# EAGLE board Robot Arm_Souri (EAGLE 5.06)
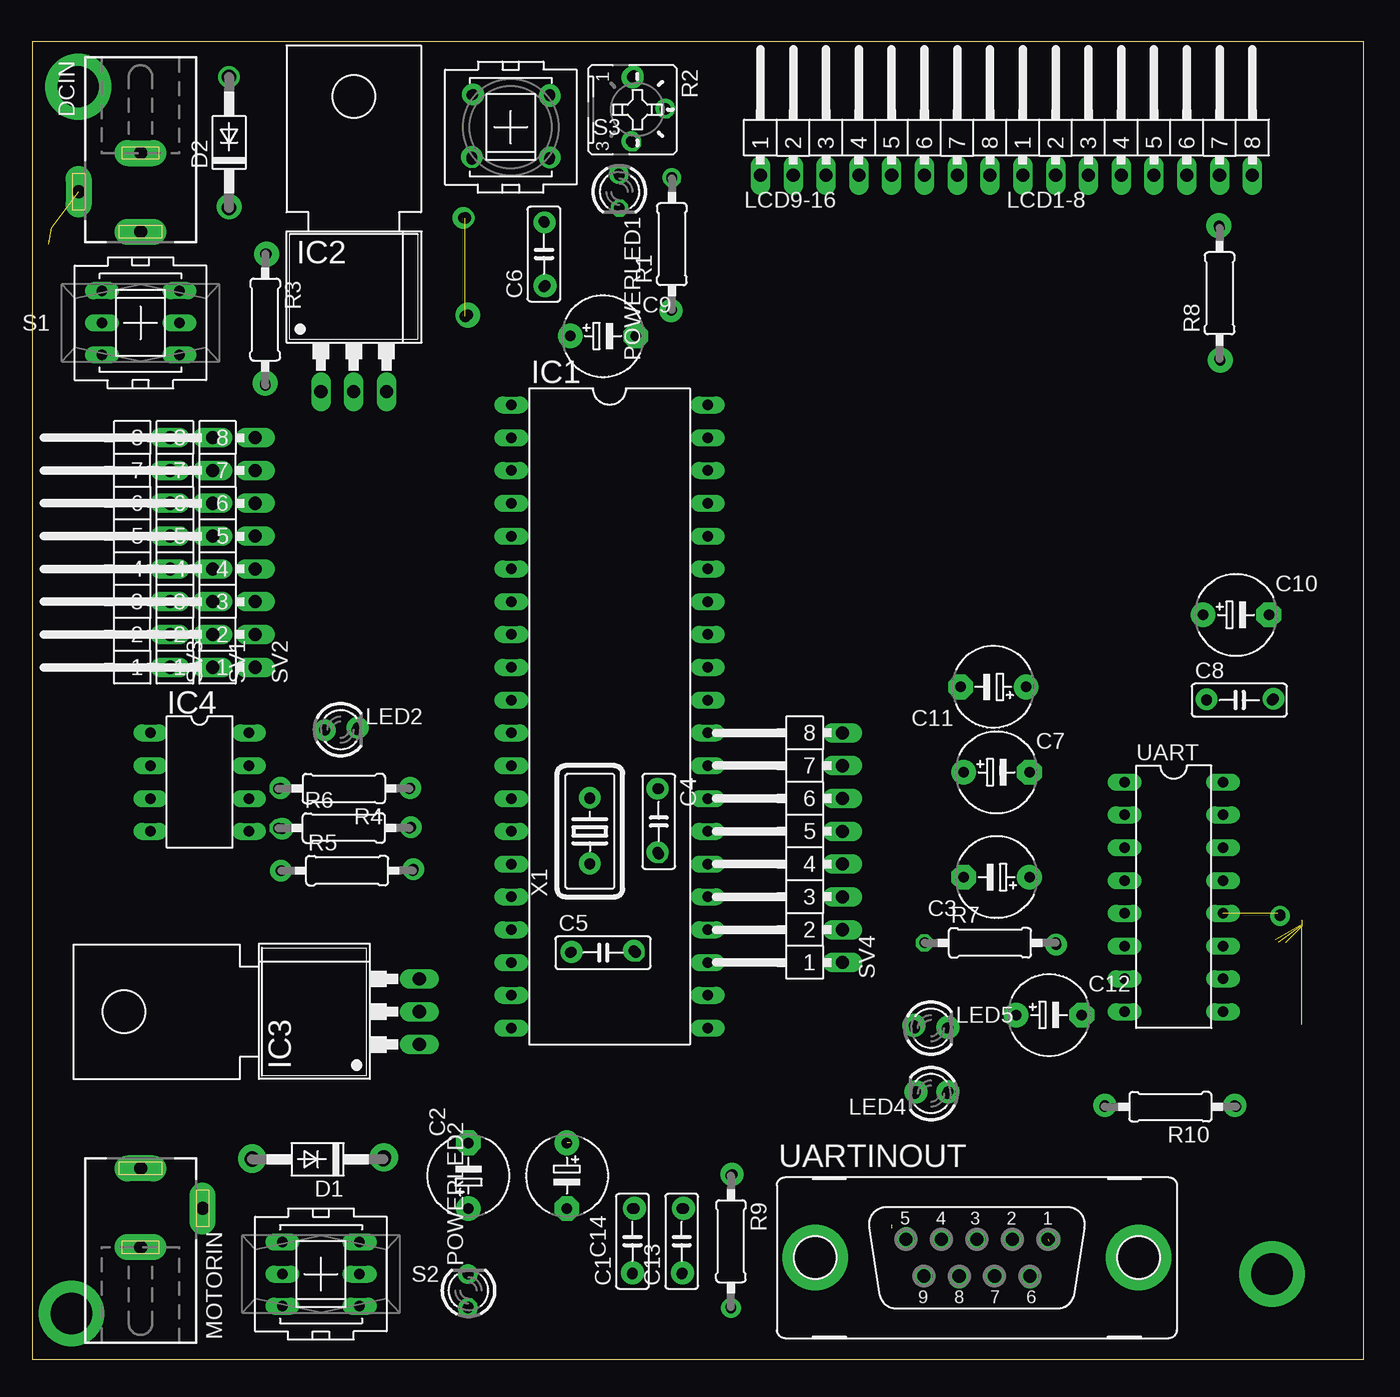
[diagram p0: board, top side]
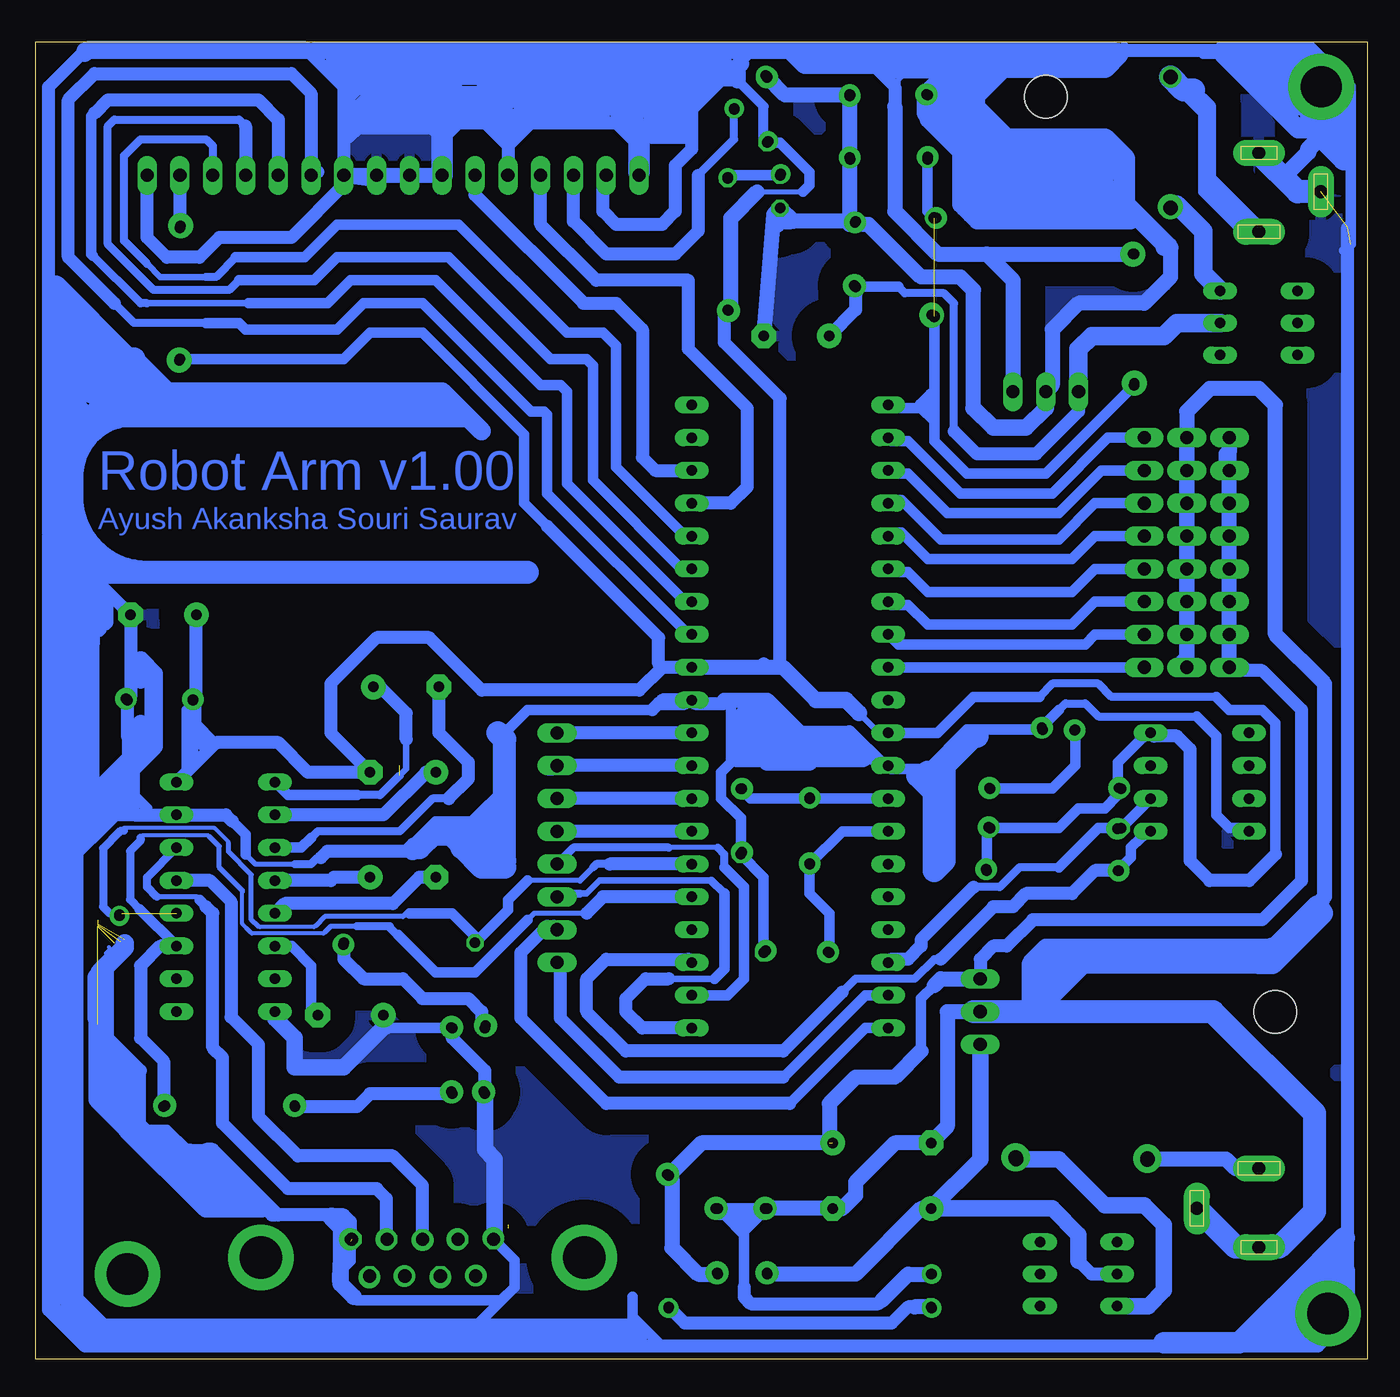
[diagram p1: board, bottom side, seen from below]

Size 103.1 x 102.03 mm. Coordinates in mm from the lower left corner, seen from the top.
Outline: 0,0 103.1,0 103.1,102.03 0,102.03 0,0
Copper layers (1*16): Top 0.035mm / dielectric 1.5mm / Bottom 0.035mm
Design rules "default *": minimum track width 10mil, minimum drill 24mil, track to track 8mil, track to pad 8mil, pad to pad 8mil, via to via 8mil, smd to smd 8mil, copper to edge 40mil, drill to drill 8mil, minimum pad ring 10mil, minimum via ring 8mil, stop-mask expansion 4mil, vias tented up to drill 0mil, thermal gap 10mil

## Footprints (pad centres in the part's own frame; a part is rotated, then mirrored left to right if it is on the bottom)
C050-025X075 = drill 0.813 octagon: 1 -2.54,0; 2 2.54,0
E5-6 = drill 0.813 pad 1.905 round: + -2.54,0 | drill 0.813 pad 1.905 octagon: - 2.54,0
DO41-10 = drill 1.118 round: A 5.08,0; C -5.08,0
DCJ0303 = drill 1 pad 2 long: 1 0,3.1; 2 4.8,0; 3 0,-3
DIL40 = drill 0.813 long: 1 -24.13,-7.62; 2 -21.59,-7.62; 3 -19.05,-7.62; 4 -16.51,-7.62; 5 -13.97,-7.62; 6 -11.43,-7.62; 7 -8.89,-7.62; 8 -6.35,-7.62; 9 -3.81,-7.62; 10 -1.27,-7.62; 11 1.27,-7.62; 12 3.81,-7.62; 13 6.35,-7.62; 14 8.89,-7.62; 15 11.43,-7.62; 16 13.97,-7.62; 17 16.51,-7.62; 18 19.05,-7.62; 19 21.59,-7.62; 20 24.13,-7.62; 21 24.13,7.62; 22 21.59,7.62; 23 19.05,7.62; 24 16.51,7.62; 25 13.97,7.62; 26 11.43,7.62; 27 8.89,7.62; 28 6.35,7.62; 29 3.81,7.62; 30 1.27,7.62; 31 -1.27,7.62; 32 -3.81,7.62; 33 -6.35,7.62; 34 -8.89,7.62; 35 -11.43,7.62; 36 -13.97,7.62; 37 -16.51,7.62; 38 -19.05,7.62; 39 -21.59,7.62; 40 -24.13,7.62
78MXXL = drill 1.016 long: GND 0,-5.08; IN -2.54,-5.08; OUT 2.54,-5.08 | hole 3.302: 0,17.78
DIL8 = drill 0.813 long: 1 -3.81,-3.81; 2 -1.27,-3.81; 3 1.27,-3.81; 4 3.81,-3.81; 5 3.81,3.81; 6 1.27,3.81; 7 -1.27,3.81; 8 -3.81,3.81
MA08-1W = drill 1.016 long: 1 -8.89,0; 2 -6.35,0; 3 -3.81,0; 4 -1.27,0; 5 1.27,0; 6 3.81,0; 7 6.35,0; 8 8.89,0
LED3MM = drill 0.813 octagon: A -1.27,0; K 1.27,0
0207/10 = drill 0.813 octagon: 1 -5.08,0; 2 5.08,0
B25P = drill 0.813 octagon: A -2.54,0; E 2.54,0; S 0,2.54
PVA2F = drill 0.813 long: 1 -2.997,2.489; 2 -2.997,0; 3 -2.997,-2.489; 4 2.997,2.489; 5 2.997,0; 6 2.997,-2.489
PVA1R = drill 0.813 octagon: 1 -2.997,2.489; 2 -2.997,-2.489; 3 2.997,2.489; 4 2.997,-2.489
DIL16 = drill 0.813 long: 1 -8.89,-3.81; 2 -6.35,-3.81; 3 -3.81,-3.81; 4 -1.27,-3.81; 5 1.27,-3.81; 6 3.81,-3.81; 7 6.35,-3.81; 8 8.89,-3.81; 9 8.89,3.81; 10 6.35,3.81; 11 3.81,3.81; 12 1.27,3.81; 13 -1.27,3.81; 14 -3.81,3.81; 15 -6.35,3.81; 16 -8.89,3.81
F09VP = drill 1.016 octagon: 1 5.486,1.422; 2 2.743,1.422; 3 0,1.422; 4 -2.743,1.422; 5 -5.486,1.422; 6 4.115,-1.422; 7 1.372,-1.422; 8 -1.372,-1.422; 9 -4.115,-1.422 | drill 3.302 pad 5.08 round: G1 -12.522,0; G2 12.522,0
HC18U-V = drill 0.813 round: 1 -2.54,0; 2 2.54,0

## Placement (x,y rotation side)
C1  [C050-025X075]  46.48,9.14 90 top
C2  [E5-6]  33.78,14.22 90 top
C3  [E5-6]  74.68,37.34 180 top
C4  [C050-025X075]  48.51,41.66 270 top
C5  [C050-025X075]  44.2,31.5 0 top
C6  [C050-025X075]  39.62,85.6 90 top
C7  [E5-6]  74.68,45.47 0 top
C8  [C050-025X075]  93.47,51.05 0 top
C9  [E5-6]  44.2,79.25 0 top
C10  [E5-6]  93.22,57.66 0 top
C11  [E5-6]  74.42,52.07 180 top
C12  [E5-6]  78.74,26.67 0 top
C13  [C050-025X075]  50.29,9.14 90 top
C14  [E5-6]  41.4,14.22 270 top
D1  1N4004  [DO41-10]  22.1,15.49 180 top
D2  1N4004  [DO41-10]  15.24,94.23 90 top
DCIN  [DCJ0303]  8.38,90.42 180 top
IC1  PIC16F877P  [DIL40]  44.7,49.78 270 top
IC2  [78MXXL]  24.89,80.01 0 top
IC3  [78MXXL]  24.89,26.92 90 top
IC4  24C64P  [DIL8]  12.95,44.7 270 top
LCD1-8  [MA08-1W]  85.6,91.69 0 top
LCD9-16  [MA08-1W]  65.28,91.69 0 top
LED2  [LED3MM]  23.88,48.77 0 top
LED4  [LED3MM]  69.6,20.57 180 top
LED5  [LED3MM]  69.6,25.65 0 top
MOTORIN  [DCJ0303]  8.38,11.68 0 top
POWERLED1  [LED3MM]  45.47,90.42 270 top
POWERLED2  [LED3MM]  33.78,5.33 90 top
R1  [0207/10]  49.53,86.36 90 top
R2  [B25P]  46.48,96.77 270 top
R3  [0207/10]  18.03,80.52 270 top
R4  [0207/10]  24.13,44.2 180 top
R5  [0207/10]  24.38,37.85 0 top
R6  [0207/10]  24.13,41.15 0 top
R7  [0207/10]  74.17,32.26 0 top
R8  [0207/10]  91.95,82.55 90 top
R9  [0207/10]  54.1,9.14 270 top
R10  [0207/10]  88.14,19.56 180 top
S1  PVA2F  [PVA2F]  8.38,80.26 180 top
S2  PVA2F  [PVA2F]  22.35,6.6 0 top
S3  PVA1R  [PVA1R]  37.05,95.42 0 top
SV1  [MA08-1W]  13.97,62.48 90 top
SV2  [MA08-1W]  17.27,62.48 90 top
SV3  [MA08-1W]  10.67,62.48 90 top
SV4  [MA08-1W]  62.74,39.62 90 top
UART  MAX232  [DIL16]  88.39,35.81 270 top
UARTINOUT  [F09VP]  73.15,7.87 0 top
X1  [HC18U-V]  43.18,40.89 90 top

## Library data of the parts
C1-C14 R1 R3-R10 = rcl
D1 D2 = diode
DCIN MOTORIN = con-jack
IC1 IC4 = microchip
IC2 IC3 = v-reg
LCD1-8 LCD9-16 SV1-SV4 = con-lstb
LED2 LED4 LED5 POWERLED1 POWERLED2 = led
R2 = pot
S1-S3 = switch-misc
UART = maxim
UARTINOUT = con-subd
X1 = crystal

## Nets
D0: IC1.19 SV4.1
D1: IC1.20 SV4.2
D2: IC1.21 SV4.3
D3: IC1.22 SV4.4
D4: IC1.27 SV4.5
D5: IC1.28 SV4.6
D6: IC1.29 SV4.7
D7: IC1.30 SV4.8
GND: C4.2 C5.2 C6.2 C8.2 C9.- C10.- C12.+ DCIN.2 DCIN.3 IC1.12 IC1.31 IC2.GND IC4.4 LCD1-8.1 LCD1-8.2 LCD1-8.8 LCD9-16.1 LCD9-16.5 LCD9-16.7 LCD9-16.8 LED2.K LED4.K LED5.K POWERLED1.K R2.A S3.1 S3.3 S3.4 UART.8 UART.15 UARTINOUT.1 UARTINOUT.5
GND1: C1.2 C2.- C13.2 C14.- IC3.GND MOTORIN.2 MOTORIN.3 POWERLED2.K SV1.1 SV1.8
N$1: IC1.2 SV2.8
N$2: IC1.3 SV2.7
N$3: IC1.4 SV2.6
N$4: IC1.5 SV2.5
N$5: IC1.6 SV2.4
N$6: IC1.7 SV2.3
N$7: IC1.8 SV2.2
N$8: IC1.9 SV2.1
N$9: C4.1 IC1.13 X1.2
N$10: C5.1 IC1.14 X1.1
N$11: D2.C S1.3
N$12: POWERLED1.A R1.2
N$13: C11.+ UART.1
N$14: C11.- UART.3
N$15: C3.+ UART.4
N$16: C7.+ UART.2
N$17: IC1.26 R7.1 UART.12
N$18: IC1.25 R10.1 UART.11
N$19: C3.- UART.5
N$20: C12.- UART.6
N$21: UART.13 UARTINOUT.3
N$22: UART.14 UARTINOUT.2
N$23: IC1.37 LCD9-16.4
N$24: IC1.38 LCD9-16.6
N$25: IC1.33 LCD1-8.3
N$26: IC1.34 LCD1-8.4
N$27: IC1.35 LCD1-8.5
N$28: IC1.36 LCD1-8.6
N$29: IC1.23 IC4.5 R5.1
N$30: IC1.18 IC4.6 R6.1
N$31: C6.1 C9.+ IC2.IN S1.2
N$32: IC1.1 R3.2 S3.2
N$33: D2.A DCIN.1
N$34: LED4.A R10.2
N$35: LCD9-16.3 R2.S
N$36: LCD1-8.7 R8.2
N$37: LED2.A R4.1
N$38: D1.A MOTORIN.1
N$39: D1.C S2.3
N$40: POWERLED2.A R9.2
N$41: C1.1 C2.+ IC3.IN S2.2
N$44: LED5.A R7.2
VCC: C7.- C8.1 C10.+ IC1.11 IC1.32 IC2.OUT IC4.8 LCD9-16.2 R1.1 R2.E R3.1 R4.2 R5.2 R6.2 R8.1 UART.16
VCC1: C13.1 C14.+ IC3.OUT R9.1 SV3.1 SV3.2 SV3.3 SV3.4 SV3.5 SV3.6 SV3.7 SV3.8

## Tracks (layer width: path | path; a pad name or v marks a point on that pad's centre or on a via)
D0
  Bottom 0.813: IC1.19 38.86,28.19 45.21,21.84
  Bottom 1.016: 45.21,21.84 57.91,21.84 62.48,26.42 62.48,30.48 SV4.1
D1
  Bottom 0.813: IC1.20 38.86,25.65 44.7,19.81
  Bottom 1.016: 44.7,19.81 58.93,19.81 65.53,26.42 65.53,31.5 63.5,33.53 62.99,33.53 SV4.2
D2
  Bottom 0.508: 54.1,29.46 50.55,29.46 | 50.8,37.08 59.44,37.08 60.45,36.07 60.96,36.07
  Bottom 0.61: 49.78,36.07 50.8,37.08 | 60.96,36.07 62.48,36.07 SV4.3
  Bottom 0.813: 49.78,36.07 49.78,30.23 50.55,29.46
  Bottom 1.016: IC1.21 56.13,25.65 57.4,26.92 57.4,27.94 55.88,29.46 54.1,29.46
D3
  Bottom 0.406: 50.29,39.62 54.1,39.62
  Bottom 0.61: 49.78,38.1 49.78,39.12 50.29,39.62 | SV4.4 61.47,39.62 54.1,39.62
  Bottom 0.813: IC1.22 49.53,28.19 48.26,29.46 48.26,36.58 49.78,38.1
D4
  Bottom 1.016: IC1.27 SV4.5
D5
  Bottom 1.016: IC1.28 SV4.6
D6
  Bottom 1.016: IC1.29 SV4.7 | SV4.7 63.25,45.97 63.5,45.72 62.99,45.72 SV4.7
D7
  Bottom 1.016: IC1.30 SV4.8
GND  (via drill 0.8 pad 1.52)  (3 unrouted)
  Bottom 0.406: 83.06,38.35 86.11,38.35 86.87,39.12 | 96.01,42.16 95.5,42.16
  Bottom 0.508: 54.61,51.05 IC1.31 | 49.78,50.8 49.78,51.05 | 19.3,101.09 12.7,101.09 | 18.8,101.6 11.43,101.6 11.18,101.6
  Bottom 0.61: 13.21,49.78 20.83,49.78 21.84,50.8 23.37,50.8 23.88,50.29 | 81.03,38.86 81.28,38.86 81.79,38.35 83.06,38.35
  Bottom 0.813: 49.78,51.05 49.28,50.55 49.28,46.23 50.04,45.47 50.04,43.43 48.51,41.91 C4.2 46.74,37.34 C5.2 | IC1.12 36.83,45.72 34.04,45.72 30.99,48.77 LED2.K 24.89,49.02 24.89,49.28 23.88,50.29 | LED5.K 75.95,25.65 | 95,22.35 95,18.29 94.49,17.78 92.96,17.78 91.44,16.26 89.92,16.26 | 78.74,9.14 78.74,7.62 79.76,6.6 79.76,6.1 78.49,4.83 78.23,4.57 67.06,4.57 66.04,5.59 | 66.04,5.59 66.04,7.67 UARTINOUT.5 | 13.21,49.78 11.68,48.26 11.68,42.16 10.67,41.15 9.4,41.15 IC4.4 | 55.37,50.29 65.02,50.29 66.55,48.77 66.55,44.45 69.34,41.66 72.14,41.66 73.91,39.88 | 18.8,101.6 19.3,101.09 | 18.8,88.9 18.29,88.9 15.24,85.85 | 12.7,101.09 11.18,101.09 | 86.87,39.12 86.87,40.64 88.39,42.16 | 96.01,48.26 96.01,42.16 | 56.9,4.83 56.9,3.3 54.61,1.02 | 11.43,101.6 4.32,101.6 1.27,98.55 1.27,86.36 1.78,85.85 | 70.61,1.02 66.04,5.59
  Bottom 1.016: UARTINOUT.5 67.67,9.04 | R2.A v46.58,99.42 46.74,99.57 | 49.78,50.8 52.07,50.8 IC1.31 | 54.61,51.05 53.09,51.05 52.83,50.8 54.86,50.8 55.37,50.29 | 87.88,41.66 88.39,42.16 UART.15 95.5,42.16 | 96.01,48.26 C8.2 95.76,51.31 C10.- 101.98,63.88 | 101.98,63.88 102.11,64.01 102.11,98.55 99.06,101.6 82.3,101.6 82.04,101.35 79.25,98.55 LCD1-8.2 79.25,90.93 83.31,86.87 88.9,86.87 90.42,85.34 92.96,85.34 94.49,86.87 LCD1-8.8 | 95,22.35 97.54,24.89 97.54,30.48 | 101.98,63.88 101.6,63.5 | 101.98,63.88 102.11,63.75 102.11,3.81 99.31,1.02 70.61,1.02 54.61,1.02 3.81,1.02 1.52,3.3 1.52,87.63 | 73.91,39.88 74.42,39.37 80.52,39.37 81.03,38.86 | LCD9-16.1 56.39,91.95 56.39,93.98 58.17,95.76 64.77,95.76 66.55,93.98 | 66.55,93.98 LCD9-16.5 | LCD9-16.7 71.63,94.49 70.36,95.76 68.33,95.76 66.55,93.98 | 78.74,9.14 78.74,10.67 79.25,11.18 84.33,11.18 89.41,16.26 89.92,16.26 | LED5.K 70.87,24.89 68.33,22.35 LED4.K | 75.95,25.65 75.95,26.42 C12.+
  Bottom 1.143: IC1.12 37.59,45.97 40.13,48.51 43.94,48.51 46.48,51.05 49.78,51.05 | 30.48,73.66 30.48,82.8 31.5,83.82 34.54,83.82 38.61,87.88 40.13,87.88 C6.2 | C6.2 44.45,88.14 POWERLED1.K 45.97,88.65 C9.- | R2.A 45.08,97.91 S3.3 S3.4 40.05,88.47 C6.2 | 15.24,85.85 15.24,83.82 17.27,81.79 22.35,81.79 24.38,79.76 24.38,75.44 IC2.GND | LCD9-16.8 LCD9-16.7 LCD9-16.8 | LCD1-8.1 LCD9-16.8 | LCD1-8.2 LCD1-8.1 | LCD1-8.2 77.22,91.44 | LCD1-8.2 LCD1-8.1
  Bottom 1.27: 30.48,73.66 28.96,72.14 26.42,72.14 24.89,73.66 IC2.GND | 79.5,7.37 79.5,5.84 78.49,4.83 | LED4.K 68.33,16.26 67.56,15.49 67.56,9.4 UARTINOUT.5 | C12.+ 76.2,25.65 79.25,22.61 83.06,22.61 83.06,24.89 84.58,26.42 UART.8 | 82.04,101.35 99.31,101.35 99.31,101.09 | 71.63,94.74 72.39,95.5 78.23,95.5 78.99,94.74 78.99,97.79 78.23,98.55 70.87,98.55 70.36,98.04 76.96,98.04 78.23,96.77 71.88,96.77 71.63,97.03 | 25.4,100.08 27.94,100.08 30.23,97.79 30.23,97.03 27.94,94.74
  Bottom 1.422: 11.18,101.09 8.89,98.81 | 8.89,98.81 8.64,98.55 | 4.32,95.25 5.33,95.25 8.89,98.81 | 8.89,98.81 8.89,99.31 7.87,100.33 7.11,100.33 5.08,98.3 5.08,99.06 5.59,99.57 5.59,97.28 5.33,97.03 5.59,97.03 7.62,99.06
  Bottom 1.676: 19.3,101.09 20.32,100.08 25.4,100.08 31.89,100.08 S3.1 34.06,96.54 32,94.49 20.32,94.49 18.8,92.96 18.8,88.9 | 56.39,91.95 56.39,95.25 59.18,98.04 63.75,98.04 66.55,95.25 69.09,97.79 69.85,97.79 71.37,96.27 71.37,96.01 71.63,95.76 71.63,94.74 LCD9-16.7
  Bottom 1.778: 18.8,88.9 23.88,88.9 24.38,89.41 20.83,89.41 19.81,90.42 | DCIN.2 5.38,90.42 DCIN.3
  pour Bottom (isolate 1.93): 5.33,101.35 99.82,101.35 102.11,99.06 102.11,3.81 99.31,1.02 3.05,1.02 1.27,2.79 1.27,98.3 4.32,101.35
GND1  (via drill 0.8 pad 1.78)
  Bottom 0.813: 48.26,9.65 48.26,9.91 C1.2 v46.63,11.68 C13.2 | 48.26,9.65 48.26,5.59 | 50.29,11.18 49.78,11.18 48.26,9.65 | 48.26,9.65 48.26,10.67 47.75,11.18 48.77,11.18 48.77,10.67 49.28,11.18
  Bottom 1.016: 37.59,4.57 37.85,4.32 47.75,4.32 48.26,4.83 48.26,5.59
  Bottom 1.143: SV1.8 13.97,54.36 14.73,53.59 SV1.1 13.97,73.41 12.19,75.18 8.38,75.18 7.11,73.91 7.11,56.13 3.3,52.32 3.3,35.81 7.11,32 24.89,32 26.16,30.73 26.16,26.92 IC3.GND 30.48,26.92 32.51,26.92 32.51,18.03 C2.- 36.58,16.76 39.62,13.72 39.62,12.7 40.64,11.68 C14.- C1.2 | POWERLED2.K 35.56,6.6 37.59,4.57
  Bottom 1.778: MOTORIN.2 10.18,8.68 MOTORIN.3 6.81,8.68 4.06,11.43 4.06,19.05 11.94,26.92 30.48,26.92
N$1
  Bottom 0.813: SV2.8 20.07,71.37 24.38,67.06 31.5,67.06 35.56,71.12 36.83,71.12 IC1.2
N$2
  Bottom 0.813: SV2.7 20.57,68.83 23.88,65.53 32.51,65.53 35.56,68.58 36.83,68.58 IC1.3
N$3
  Bottom 0.813: SV2.6 21.08,66.29 23.88,63.5 33.02,63.5 36.07,66.55 36.83,66.55 IC1.4
N$4
  Bottom 0.813: SV2.5 21.08,63.75 22.86,61.98 34.04,61.98 36.07,64.01 36.83,64.01 IC1.5
N$5
  Bottom 0.813: SV2.4 21.08,61.21 22.86,59.44 34.04,59.44 35.56,60.96 36.83,60.96 IC1.6
N$6
  Bottom 0.813: SV2.3 21.08,58.67 22.86,56.9 34.04,56.9 35.56,58.42 36.83,58.42 IC1.7
N$7
  Bottom 0.813: SV2.2 21.08,56.13 21.84,55.37 36.32,55.37 IC1.8
N$8
  Bottom 0.813: SV2.1 IC1.9
N$9
  Bottom 0.813: IC1.13 X1.2 47.75,43.43 C4.1
N$10
  Bottom 0.813: C5.1 41.66,34.54 43.18,36.07 X1.1 40.64,40.89 IC1.14
N$11
  Bottom 1.422: D2.C 14.73,89.41 12.7,87.38 12.7,84.07 S1.3
N$12
  Bottom 0.813: POWERLED1.A 49.28,91.69 R1.2
N$13  (1 unrouted)
  Bottom 0.508: 74.42,48.01 74.42,45.72 74.93,45.21
  Bottom 0.61: 74.93,45.21 76.45,43.69 78.23,43.69
  Bottom 0.813: 78.23,43.69 83.57,43.69 UART.1
  Bottom 1.016: C11.+ 76.45,52.07 74.42,50.04 74.42,48.01
N$14
  Bottom 0.61: 71.12,43.43 72.39,43.43 74.93,40.89 81.28,40.89 81.79,40.39
  Bottom 0.813: 81.79,40.39 82.55,39.62 UART.3
  Bottom 1.016: C11.- 71.88,48.51 69.6,46.23 69.6,44.96 71.12,43.43
N$15
  Bottom 1.016: C3.+ 80.01,37.34 80.26,37.08 UART.4
N$16
  Bottom 1.016: C7.+ 72.9,45.47 76.2,42.16 UART.2
N$17  (1 unrouted)
  Bottom 0.305: 85.9,33.53 85.85,33.58 85.75,33.48 81.58,33.48 81.48,33.58 81.43,33.58 | 88.19,39.98 88.19,40.08 89.26,41.15 96.32,41.15 96.67,40.79 | 96.27,40.95 96.16,41.05
  Bottom 0.406: 60.96,37.08 65.02,37.08 | 74.17,34.54 74.42,34.54 74.68,34.29 80.72,34.29 81.43,33.58 | 88.19,39.98 88.19,39.32 86.41,37.54 86.41,34.04 85.9,33.53
  Bottom 0.508: 59.94,38.1 60.96,37.08
  Bottom 0.61: 58.67,38.35 59.69,38.35 59.94,38.1 | 96.47,34.54 97.38,34.54 97.89,35.05 97.89,39.57 96.67,40.79 96.52,40.95 96.27,40.95
  Bottom 0.813: 65.02,37.08 66.55,35.56 66.55,34.8 R7.1 69.09,32.77 70.87,34.54 74.17,34.54
  Bottom 1.016: IC1.26 58.67,38.35
N$18
  Bottom 0.305: 86.82,33.43 87.12,33.73 87.12,36.22 | 80.72,33.07 80.82,32.97 86.36,32.97 86.46,33.07 | 89.66,40.49 89.76,40.59 94.79,40.59 95,40.39
  Bottom 0.356: 86.46,33.07 86.82,33.43
  Bottom 0.406: 60.45,34.54 64.52,34.54 65.02,34.04 | 78.23,33.53 80.26,33.53 80.72,33.07 | 87.12,36.22 87.12,36.32 88.9,38.1 88.9,39.73 89.66,40.49
  Bottom 0.61: 75.79,33.53 75.69,33.53 | 75.79,33.53 78.23,33.53 | 75.03,32.87 75.13,32.87 75.79,33.53 | 95,40.39 95,40.18 95.81,39.37 95.81,35.61 95.05,34.85
  Bottom 0.813: 65.02,34.04 69.09,29.97 72.14,29.97 75.03,32.87 | 95.05,34.85 UART.11
  Bottom 1.016: R10.1 93.22,23.11 95,24.89 95,30.48 93.47,32 UART.11 | IC1.25 59.18,35.81 60.45,34.54
N$19
  Bottom 1.016: C3.- 73.41,37.34 75.44,35.31 83.82,35.31 UART.5
N$20
  Bottom 0.813: UART.6 83.31,32 81.79,30.48 81.79,26.92 C12.-
N$21
  Bottom 1.016: UARTINOUT.3 73.15,13.46 75.44,15.75 82.8,15.75 85.85,18.8 85.85,24.38 87.99,26.52 87.99,35.46 89.61,37.08 UART.13
N$22
  Bottom 0.406: 90.42,35.56 90.68,35.81 93.73,35.81
  Bottom 0.61: UART.14 94.49,37.34 94.49,36.58 93.73,35.81
  Bottom 0.813: 89.92,35.05 90.42,35.56
  Bottom 1.016: 89.92,35.05 89.41,34.54 89.41,24.13 88.65,23.37 88.65,18.29 83.57,13.21 76.71,13.21 75.95,12.45 75.95,9.35 UARTINOUT.2
N$23
  Bottom 1.016: LCD9-16.4 64.01,87.88 59.69,83.57 52.58,83.57 52.58,78.23 48.01,73.66 48.01,67.56 49.28,66.29 IC1.37
N$24
  Bottom 1.016: LCD9-16.6 69.09,90.17 60.71,81.79 58.17,81.79 56.13,79.76 56.13,69.85 55.12,68.83 IC1.38
N$25
  Bottom 0.61: 97.03,81.79 95.5,80.26 89.92,80.26
  Bottom 0.813: IC1.33 52.58,56.13 63.5,67.06 63.5,73.15 63.75,73.41 64.77,73.41 73.15,81.79 77.72,81.79 78.1,81.41 79.76,79.76 86.87,79.76 87.38,80.26 89.92,80.26
  Bottom 1.016: LCD1-8.3 81.53,91.95 81.28,91.95 81.79,92.46 81.79,98.04 83.31,99.57 98.55,99.57 100.58,97.54 100.58,85.34 97.03,81.79
N$26
  Bottom 0.508: 86.61,81.79 94.49,81.79
  Bottom 0.61: 94.49,81.79 95,81.79 98.68,85.47
  Bottom 0.813: IC1.34 52.83,58.67 61.98,67.82 61.98,74.93 62.48,75.44 64.01,75.44 72.14,83.57 78.74,83.57 78.99,83.31 80.52,81.79 86.61,81.79 | 98.55,96.52 98.81,96.27 98.81,85.6 98.68,85.47
  Bottom 1.016: 98.55,96.52 97.54,97.54 85.85,97.54 84.33,96.01 LCD1-8.4
N$27
  Bottom 0.61: 86.87,95.5 87.38,96.01 97.03,96.01 97.54,95.5 97.54,86.36 93.98,82.8 88.14,82.8 87.38,83.57
  Bottom 0.813: 52.58,61.47 52.58,61.21 IC1.35 53.09,61.21 59.94,68.07 59.94,76.96 60.45,77.47 63.25,77.47 71.12,85.34 79.76,85.34 81.53,83.57 87.38,83.57
  Bottom 1.016: 86.87,95.5 LCD1-8.5
N$28
  Bottom 0.508: 89.92,83.82 93.47,83.82 94.49,84.84
  Bottom 0.61: LCD1-8.6 89.41,93.98 89.92,94.49 95,94.49 96.27,93.22 96.27,86.61 94.49,84.84 | 87.63,85.34 89.15,83.82 89.92,83.82
  Bottom 0.813: IC1.36 52.83,63.75 56.77,67.69 | 87.63,85.34 82.3,85.34 80.26,87.38 79.76,87.88 70.36,87.88 61.98,79.5 59.18,79.5 58.17,78.49 58.17,69.09 56.77,67.69 | 56.77,67.69 56.9,67.82
N$29
  Bottom 0.61: 40.64,28.45 39.62,29.46 35.05,29.46 33.53,30.99 33.02,30.99
  Bottom 0.813: IC4.5 17.53,40.39 18.29,39.62 18.29,38.86 R5.1
  Bottom 1.016: 40.64,28.45 45.21,23.88 57.4,23.88 60.45,26.92 60.45,29.46 58.93,30.99 52.58,30.99 IC1.23 | R5.1 21.08,37.85 22.86,36.07 26.42,36.07 27.43,35.05 28.96,35.05 33.02,30.99
N$30
  Bottom 0.61: 23.88,38.1 26.92,38.1 28.45,36.58 30.48,36.58
  Bottom 0.813: IC4.6 R6.1 20.83,41.15 23.88,38.1
  Bottom 1.016: 30.48,36.58 34.54,32.51 34.54,32 35.56,30.99 36.83,30.99 IC1.18
N$31
  Bottom 0.61: 32,71.63 32,71.88 32,81.79 32.77,82.55 35.81,82.55 36.32,83.06
  Bottom 0.813: 36.32,83.06 C6.1
  Bottom 1.016: IC2.IN 22.35,73.41 25.65,70.1 30.23,70.1 32,71.88 | C6.1 39.62,81.28 C9.+
  Bottom 1.422: S1.2 14.73,80.26 15.75,79.25 21.34,79.25 22.35,78.23 IC2.IN
N$32  (1 unrouted)
  Bottom 0.406: IC1.1 34.8,73.91 33.53,72.64
  Bottom 0.813: S3.2 34.06,88.92 33.53,88.39 | R3.2 24.89,68.58 30.99,68.58 33.53,71.12 33.53,72.64 | 33.53,72.64 34.54,73.66 36.83,73.66 IC1.1 | 33.53,72.64 33.53,80.77
N$33
  Bottom 1.016: 12.19,91.13 12.19,97.03 13.46,98.3
  Bottom 1.422: DCIN.1 12.19,91.13
  Bottom 1.778: 13.46,98.3 14.22,98.3 D2.A
N$34
  Bottom 0.813: R10.2 82.8,19.3
  Bottom 1.016: LED4.A 77.22,20.57 78.23,19.56 R10.2
N$35
  Bottom 0.61: R2.S 49.02,94.49 51.82,91.69
  Bottom 1.016: 51.82,91.69 51.82,87.38 53.59,85.6 58.93,85.6 61.47,88.14 LCD9-16.3
N$36
  Bottom 1.016: LCD1-8.7 R8.2
N$37
  Bottom 0.813: LED2.A 22.61,45.97 24.38,44.2 R4.1
N$38
  Bottom 1.143: MOTORIN.1 10.21,14.78 10.92,15.49 D1.A
N$39
  Bottom 1.27: S2.3 16.97,4.12 15.75,5.33 15.75,10.41 17.27,11.94 20.32,11.94 23.88,15.49 D1.C
N$40
  Bottom 1.016: 35.05,4.06 35.56,4.06 36.83,2.79 52.83,2.79 R9.2
  Bottom 1.143: POWERLED2.A 35.05,4.06
N$41
  Bottom 1.016: 22.35,7.62 21.34,6.6 S2.2
  Bottom 1.143: 29.97,11.68 C2.+ 34.54,11.68 39.62,6.6 C1.1
  Bottom 1.27: 22.35,7.62 22.35,9.65 24.38,11.68 C2.+ 29.97,15.49 IC3.IN
N$42  (via drill 0.9 pad 1.42)
  other vias: 33.53,80.77
N$43  (via drill 0.9 pad 1.42)
  other vias: 33.53,88.39
N$44
  Bottom 1.016: R7.2 79.25,30.99 77.72,29.46 74.68,29.46 73.15,27.94 69.6,27.94 68.58,26.92 68.58,25.91 LED5.A
N$45
  Bottom 1.016: 68.33,20.32 68.33,20.07
N$46
  Bottom 0.813: 12.7,90.93 12.7,96.52 14.22,98.04
N$47
  Bottom 0.813: 12.7,90.68 12.7,90.42 9.4,87.12
N$48
  Bottom 1.016: 17.78,101.35 19.56,101.35 30.99,101.35 33.02,99.31
  Bottom 1.27: 19.56,101.35 81.53,101.35 81.53,101.09
N$49
  Bottom 0.813: 31.75,93.98 31.75,89.66 31.5,89.41 | 31.24,89.15 30.48,88.39
  Bottom 1.016: 17.78,88.14 18.29,88.14 18.54,88.14 19.05,88.65
  Bottom 1.27: 18.8,88.65 30.73,88.65 31.24,89.15 | 31.24,89.15 31.5,89.41 | 18.29,88.14 30.23,88.14 31.24,89.15
N$50
  Bottom 1.016: 34.54,73.91 33.78,74.68
N$51
  Bottom 1.016: 34.04,73.66 33.78,73.41
N$53
  Bottom 0.813: 92.2,74.68 95.25,77.72 96.27,77.72 100.58,82.04 101.35,82.04 101.6,82.3 101.6,81.28 101.6,4.06 100.84,3.3 100.58,3.3 99.06,1.78 56.13,1.78 55.88,2.03
  Bottom 1.422: 89.41,74.68 92.15,74.68 92.2,74.62 | 92.3,74.52 92.2,74.62 | 91.29,74.62 92.2,74.62 | 91.29,74.62 90.42,74.62 90.22,74.83 91.08,74.83 91.29,74.62 | 91.29,74.62 92.46,74.62 92.56,74.52 93.27,74.52 93.32,74.47 92.66,74.47 92.41,74.22 92.3,74.22 91.9,73.81 90.42,73.81 | 90.42,73.81 90.02,73.81 89.76,73.56 | 92.2,74.68 91.29,74.68 90.42,73.81
  Bottom 1.778: 101.6,81.28 101.35,81.28 95.25,75.18 95.25,76.71 95.5,76.96 95.5,76.71 92.71,73.91 95.5,73.91 100.84,79.25 100.84,69.85 100.58,69.6 100.58,71.12 96.77,74.93 98.81,74.93 100.08,76.2 100.08,73.66 99.57,73.15
N$54
  Bottom 0.305: 97.43,31.9 97.43,31.7 97.69,31.45
N$55
  Bottom 0.813: 89.92,15.49 89.66,15.49 86.36,12.19
N$56
  Bottom 0.813: 86.11,11.94 88.14,11.94 88.65,11.94 88.9,12.19
  Bottom 1.422: 93.98,16.76 92.96,16.76 88.14,11.94 89.15,11.94 93.22,16 91.19,16 87.38,12.19
N$57
  Bottom 0.813: 95.5,17.27 92.71,17.27
N$58
  Bottom 0.813: 95.76,18.03 95.76,21.84 95.5,22.1
N$60
  Bottom 0.813: 95.25,43.43 94.49,42.67
N$61
  Bottom 0.406: 95.5,42.47 95.5,42.93 | 95.55,42.42 95.5,42.42 | 95.5,42.42 95.45,42.42 95.5,42.47 | 95.55,42.42 95.5,42.47 | 95.55,42.42 95.55,42.37 95.5,42.42
N$64
  Bottom 1.422: 93.22,73.66 70.36,73.66 70.1,73.41 | 70.1,73.41 69.6,72.9 | 96.27,72.9 69.6,72.9 | 69.6,72.9 68.58,71.88 | 92.96,74.93 71.63,74.93 70.1,73.41
N$65
  Bottom 1.778: 100.08,62.48 arc-90 98.55,60.96 89.41,60.96 | 89.41,60.96 65.02,60.96 | 100.33,66.8 arc-90 94.49,60.96 89.41,60.96
N$66
  Bottom 1.778: 95.5,73.15 arc-90 100.33,68.33 100.33,59.18
N$67
  Bottom 1.778: 30.23,48.26 30.48,48.26 32.77,45.97 32.77,38.61 33.53,37.85 33.53,44.96 34.04,45.47
N$68
  Bottom 1.778: 40.64,47.5 39.88,47.5 39.12,46.74 43.18,46.74 44.96,48.51
N$69
  Bottom 1.778: 33.27,43.69 34.8,45.21
N$72
  Bottom 1.422: 73.41,39.62 73.66,39.62 73.91,39.37
  Bottom 1.778: 69.85,40.64 72.39,40.64 73.41,39.62
N$73
  Bottom 1.422: 85.6,11.68 89.92,11.68 96.01,17.78
N$74  (3 unrouted)
  Bottom 1.422: 98.3,25.15 98.3,25.96 98.3,20.12 96.11,17.93 96.11,22.25 97.43,23.57 97.43,20.62 96.62,19.81
N$75
  Bottom 1.422: 94.23,47.5 94.74,47.5 98.55,43.69 97.79,43.69 93.98,47.5 93.98,53.09 95,54.1
N$76
  Bottom 0.305: 98.25,40.49 98.25,40.44 98.3,40.39
  Bottom 0.406: 95.76,42.93 95.81,42.93 98.25,40.49 98.3,40.44
  Bottom 1.422: 95.76,42.93 95.76,46.23
N$78
  Bottom 1.422: 97.79,57.15 97.79,58.17 99.31,59.69 99.31,57.66 98.3,56.64 99.31,56.64 101.09,58.42
N$79
  Bottom 1.778: 100.33,56.39 100.33,4.57 98.04,2.29 57.15,2.29 56.9,2.03
N$80
  Bottom 1.778: 99.06,56.9 99.06,55.37 | 99.06,40.64 99.06,55.37 | 99.06,55.37 100.84,57.15
N$83
  Bottom 1.778: 95.5,77.47 96.01,77.47 101.6,83.06
N$84
  Bottom 1.778: 43.43,47.75 40.89,47.75
N$85
  Bottom 1.778: 67.06,38.86 69.09,38.86 71.12,40.89 68.58,40.89 67.31,42.16 67.31,39.88 67.56,39.62 68.07,39.62 68.58,40.13
N$86
  Bottom 1.778: 66.8,38.61 66.8,48.01 67.31,48.51
N$87
  Bottom 1.778: 66.8,38.1 68.58,38.1 70.1,39.62
N$88
  Bottom 1.27: 3.56,94.74 4.57,93.73 4.57,93.47 6.1,91.95
  Bottom 1.778: 4.57,99.06 2.03,96.52 3.81,96.52 4.32,97.03 4.32,95.5 3.56,94.74 1.78,92.96 1.78,94.74 2.79,95.76
N$89
  Bottom 1.778: 45.21,48.51 45.47,48.51 46.99,50.04 46.99,48.26 48.01,47.24 48.26,47.24 48.77,46.74
N$90
  Bottom 1.778: 20.83,93.22 22.1,93.22 23.88,91.44 23.88,92.96 24.38,93.47 24.38,92.46 24.89,91.95 24.89,92.71 26.16,93.98 26.16,92.46 26.67,91.95 26.67,92.46 27.69,93.47 30.23,93.47 30.73,92.96 30.73,90.17 29.72,89.15 27.69,89.15 | 27.43,89.15 27.69,89.15 | 27.69,89.15 29.97,91.44 29.97,91.69 29.72,91.95 24.64,91.95 22.86,93.73
N$91
  Bottom 1.778: 10.41,100.84 5.08,100.84 2.03,97.79
N$94
  Bottom 1.27: 78.99,8.13 78.99,7.87 79.25,7.62
N$95  (1 unrouted)
N$96
  Bottom 1.27: 48.26,50.04 48.26,47.75
N$97
  Bottom 1.27: 43.18,46.23 46.48,46.23 46.48,48.01 45.21,48.01 45.21,46.74
N$98
  Bottom 1.27: 45.97,46.48 48.51,46.48 48.51,46.74
N$99
  Bottom 1.27: 95.76,47.5 95,47.5 95,49.28
N$100
  Bottom 1.27: 95,53.59 95,52.58
N$101
  Bottom 1.422: 19.3,92.71 21.34,90.68 21.34,91.95 21.59,92.2 21.59,91.95 23.11,90.42 22.35,90.42 22.1,90.17
N$102
  Bottom 1.422: 23.37,88.65 27.18,88.65 | 27.18,88.65 27.43,88.65 28.45,89.66 28.45,90.42 27.18,91.69 25.91,91.69 24.38,90.17 26.92,90.17 26.92,90.42 26.67,90.68 26.67,89.92 25.65,88.9 | 27.18,88.65 29.97,88.65 30.99,89.66
N$103
  Bottom 1.778: 25.15,27.69 25.15,29.72 23.62,31.24
N$104
  Bottom 1.778: 23.88,31.5 7.62,31.5 7.37,31.75
N$105
  Bottom 1.778: 7.11,30.99 7.11,31.75 3.81,35.05
N$106
  Bottom 1.778: 24.64,28.19 22.1,30.73 8.38,30.73 7.37,30.73 3.56,34.54
N$110
  Bottom 1.016: 15.75,86.11 18.29,88.65
  Bottom 1.27: 15.75,86.11 15.24,86.11
N$111
  Bottom 1.016: 15.24,86.36 18.54,89.66 | 18.54,89.66 18.8,89.92 18.8,88.9 19.56,89.66 19.56,90.17 18.8,90.17 18.54,89.92 18.54,89.66
N$112  (via drill 3.2 pad 5.08)
  other vias: 96.01,6.6
N$113  (via drill 3.2 pad 5.08)
  other vias: 3.05,3.56
N$114  (via drill 3.2 pad 5.08)
  other vias: 3.56,98.55
N$115
  Bottom 1.676: 1.78,6.86 1.78,4.57 4.83,1.52 4.83,5.08 2.29,7.62 2.29,5.33 4.06,3.56
N$116
  Bottom 1.676: 2.03,9.14 2.03,8.13 8.64,1.52 6.86,1.52 5.59,2.79 5.59,5.59 | 5.59,5.59 1.78,9.4 | 5.59,5.59 8.38,2.79 | 8.38,2.79 9.65,1.52 | 15.75,1.27 9.91,1.27 8.38,2.79
N$117
  Bottom 1.016: 84.58,11.18 84.84,11.18 85.34,11.68
N$118
  Bottom 1.27: 44.7,88.14 45.47,88.14 45.72,87.88
N$119
  Bottom 1.676: 69.6,96.52 68.83,96.52
N$120
  Bottom 1.676: 64.01,96.52 59.44,96.52
N$121
  Bottom 1.27: 32.77,100.58 43.43,100.58
N$122
  Bottom 1.27: 49.78,100.33 80.01,100.33 80.01,100.58
N$123
  Bottom 1.27: 50.29,99.31 79.5,99.31
N$124
  Bottom 1.27: 51.56,98.55 58.17,98.55 58.17,98.3
N$125
  Bottom 1.27: 52.32,97.79 57.15,97.79
N$126
  Bottom 1.27: 52.83,97.03 56.64,97.03 56.64,96.77 55.37,96.77 55.37,94.74 52.83,94.74 52.83,96.01 54.61,96.01 54.61,95.76
N$127
  Bottom 1.27: 64.77,98.55 68.33,98.55 68.33,97.54 66.8,97.54 | 65.28,97.54 66.8,97.54 | 66.8,97.54 66.8,96.77
N$128
  Bottom 1.27: 28.96,99.57 30.73,99.57 33.27,97.03 32.26,97.03 32,96.77 | 32,96.77 30.48,95.25 31.75,95.25 32.51,96.01 32.51,96.77 30.73,98.55 | 30.73,98.55 29.46,99.82 29.46,99.31 32,96.77 | 32,96.77 32,97.28 30.73,98.55 | 30.73,98.55 30.73,97.03 28.45,94.74
N$129
  Bottom 1.27: 31.5,93.22 31.5,93.47 34.04,96.01
N$130
  Bottom 1.27: 33.02,99.82 37.08,99.82
N$131
  Bottom 0.406: 36.32,96.77 36.32,99.06 36.07,99.31
N$132
  Bottom 0.406: 95.45,41.86 96.88,41.86 98.55,40.18
N$133
  Bottom 1.676: 96.32,44.04 96.32,43.59 98.3,41.61 98.3,42.62 98.09,42.82 96.77,42.82 96.52,42.57
N$134
  Bottom 1.676: 96.11,42.88 96.77,42.88 100.74,38.91
N$135
  Bottom 1.422: 96.22,32.21 96.22,31.9 98.15,29.97
N$136  (1 unrouted)
N$137  (1 unrouted)
N$138
  Bottom 1.422: 94.39,73.1 79.91,73.1 79.76,73.25
N$139  (via drill 0.6)
  other vias: 96.57,34.49
N$140
  Bottom 1.422: 79.25,8.74 79.25,7.57 79.4,7.42 79.4,10.21 80.21,11.02
N$141  (via drill 0.8 pad 1.68)
  other vias: 43.18,43.48
N$142  (via drill 0.8 pad 1.68)
  other vias: 48.41,44.2
N$143  (via drill 0.8 pad 1.68)
  other vias: 43.18,38.4
N$144  (via drill 0.8 pad 1.68)
  other vias: 41.76,31.55
N$145  (via drill 0.8 pad 1.68)
  other vias: 46.58,31.65
N$146  (via drill 0.8 pad 1.68)
  other vias: 48.41,39.27
N$147  (via drill 0.8 pad 1.68)
  other vias: 25.2,48.92
N$148  (via drill 0.8 pad 1.68)
  other vias: 22.66,48.72
N$149  (via drill 0.8 pad 1.68)
  other vias: 19.2,44.25
N$150  (via drill 0.8 pad 1.68)
  other vias: 19.35,41.1
N$151  (via drill 0.8 pad 1.68)
  other vias: 29.31,41.2
N$152  (via drill 0.8 pad 1.68)
  other vias: 29.26,44.25
N$153  (via drill 0.8 pad 1.68)
  other vias: 29.51,37.95
N$154  (via drill 0.8 pad 1.68)
  other vias: 19.25,37.85
N$155  (via drill 0.8 pad 1.68)
  other vias: 90.93,51.1
N$156  (via drill 0.8 pad 1.68)
  other vias: 96.11,51.16
N$157  (via drill 1.1 pad 1.93)
  other vias: 17.02,15.44
N$158  (via drill 1.1 pad 2.18)
  other vias: 27.23,15.65
N$159  (via drill 1.1 pad 2.18)
  other vias: 17.02,15.54
N$160  (via drill 0.8 pad 1.27)
  other vias: 96.62,34.44
N$161  (via drill 0.8 pad 1.78)
  other vias: 68.43,20.73
N$162  (via drill 0.8 pad 1.78)
  other vias: 68.28,25.86
N$163  (via drill 0.8 pad 1.78)
  other vias: 70.92,25.7
N$164  (via drill 0.8 pad 1.78)
  other vias: 70.92,20.73
N$165  (via drill 0.8 pad 1.78)
  other vias: 83.06,19.66
N$166  (via drill 0.8 pad 1.78)
  other vias: 93.12,19.66
N$167  (via drill 0.8 pad 1.78)
  other vias: 54.2,14.33
N$168  (via drill 0.8 pad 1.78)
  other vias: 50.34,6.71
N$169  (via drill 0.8 pad 1.78)
  other vias: 46.48,6.71
N$170  (via drill 0.8 pad 1.78)
  other vias: 50.44,11.68
N$171  (via drill 0.8 pad 1.78)
  other vias: 39.73,83.16
N$172  (via drill 0.8 pad 1.78)
  other vias: 49.48,81.23
N$173  (via drill 0.8 pad 1.42)
  other vias: 49.53,91.54
N$174  (via drill 0.8 pad 1.52)
  other vias: 45.42,91.8
N$175  (via drill 0.8 pad 1.52)
  other vias: 46.38,94.34
N$176  (via drill 0.8 pad 1.52)
  other vias: 49.02,96.88
N$177  (via drill 0.8 pad 1.6)
  other vias: 40.08,97.94
N$178  (via drill 0.8 pad 1.68)
  other vias: 34.04,93.12
N$179  (via drill 0.8 pad 1.68)
  other vias: 34.14,97.94
N$180  (via drill 0.8 pad 1.68)
  other vias: 33.38,88.39
N$181  (via drill 0.8 pad 1.68)
  other vias: 40.08,93.07
N$182  (via drill 0.8 pad 1.68)
  other vias: 40.08,97.84
N$183  (via drill 0.8 pad 1.68)
  other vias: 39.67,88.04
N$184  (via drill 0.8 pad 1.68)
  other vias: 46.48,99.26
N$185  (via drill 0.8 pad 1.93)
  other vias: 15.24,89.26
N$186  (via drill 0.8 pad 1.93)
  other vias: 33.73,80.87
N$187  (via drill 0.8 pad 1.93)
  other vias: 18.03,75.59
N$188  (via drill 0.8 pad 1.93)
  other vias: 91.9,87.78
N$189  (via drill 0.8 pad 1.93)
  other vias: 92,77.37
N$190  (via drill 0.8 pad 1.52)
  other vias: 96.62,34.34
N$191
  Bottom 1.27: 98.45,26.42 98.45,29.62 97.84,30.23
N$192  (via drill 0.8 pad 1.52)
  other vias: 54.1,3.96
N$193  (via drill 0.8 pad 1.52)
  other vias: 33.73,3.96
N$194  (via drill 0.8 pad 1.52)
  other vias: 33.73,6.6
N$195  (via drill 0.8 pad 1.68)
  other vias: 67.67,9.4
N$196  (via drill 0.8 pad 1.68)
  other vias: 70.46,9.3
N$197  (via drill 0.8 pad 1.68)
  other vias: 73.15,9.25
N$198  (via drill 0.8 pad 1.68)
  other vias: 75.95,9.3
N$199  (via drill 0.8 pad 1.68)
  other vias: 78.79,9.3
N$200  (via drill 0.8 pad 1.68)
  other vias: 69.04,6.5
N$201  (via drill 0.8 pad 1.68)
  other vias: 71.78,6.35
N$202  (via drill 0.8 pad 1.68)
  other vias: 74.57,6.45
N$203  (via drill 0.8 pad 1.68)
  other vias: 77.27,6.35
N$204  (via drill 0.8 pad 1.68)
  other vias: 79.3,32.11
VCC  (via drill 0.8 pad 1.93)
  Bottom 0.406: 58.93,91.19 LCD9-16.2 | 47.24,90.42 43.69,90.42
  Bottom 0.508: 39.37,50.04 38.1,48.77 37.34,48.77 IC1.11
  Bottom 0.61: R6.2 29.21,40.89 29.46,40.64 | 11.68,51.31 19.81,51.31 20.83,52.32 24.38,52.32 25.4,51.31
  Bottom 0.762: 48.77,99.06 46.74,97.03 46.74,94.49 R2.E
  Bottom 0.813: R2.E 45.47,94.23 43.18,91.95 43.18,90.93 43.69,90.42 | 19.3,44.45 19.3,46.23 17.53,48.01 IC4.8 16.51,48.26 | 19.3,44.45 R4.2 | R5.2 29.46,40.64 29.46,40.89 R6.2 23.88,41.15 22.35,42.67 20.32,42.67 19.3,43.69 19.3,44.45 | 36.32,48.51 33.27,48.51 30.48,51.31 25.4,51.31 | 11.68,51.31 10.67,50.29 8.13,50.29 7.11,49.28 7.11,39.12 | 90.93,49.53 90.93,46.23 91.44,45.72 91.44,50.29 90.68,51.05 90.68,48.01 90.17,47.5 | R8.1 79.25,77.47 77.22,79.5 73.15,79.5 65.28,71.63 65.28,66.29 63.5,64.52
  Bottom 1.016: 89.28,47.62 89.15,47.75 84.33,47.75 82.04,45.47 C7.- 80.26,48.51 80.26,52.32 76.71,55.88 72.64,55.88 68.58,51.82 56.39,51.82 54.61,53.59 | 89.28,47.62 UART.16 | IC1.32 54.61,53.59 | 89.28,47.62 90.93,49.28 90.93,49.53 C8.1 90.68,51.31 C10.+ | R1.1 49.78,81.03 49.78,78.74 45.47,74.42 45.47,53.85 44.7,53.09 | 63.5,64.52 54.86,55.88 54.86,53.85 54.61,53.59 | 16.51,48.26 14.73,48.26 13.72,47.24 13.72,38.61 12.19,37.08 9.14,37.08 7.11,39.12 | 48.77,99.06 50.04,99.06 | 50.04,99.06 52.32,96.77 52.32,93.73 53.59,92.46 53.59,88.9 54.61,87.88 58.17,87.88 59.18,88.9 59.18,90.93 58.93,91.19 | 46.48,53.59 46.74,53.85 | 50.04,99.06 47.75,101.35 44.96,101.35 43.69,100.08 38.1,100.08 36.58,98.55 36.58,97.03
  Bottom 1.143: 36.32,48.51 IC1.11 | 42.67,51.05 44.7,53.09 45.21,53.59 46.48,53.59 IC1.32 | 29.46,85.6 v18.14,85.6 R3.1 | 29.46,85.6 33.27,85.6 36.58,88.9 36.58,97.03 | IC2.OUT 27.43,83.57 29.46,85.6 | 47.24,90.42 49.28,88.39 49.28,81.53 R1.1
  Bottom 1.27: 42.67,51.05 40.39,51.05 39.37,50.04 | 48.77,99.06 48.77,100.08 48.51,100.33
VCC1  (1 unrouted)
  Bottom 0.813: 33.53,28.96 34.54,27.94 34.54,23.88
  Bottom 1.016: SV3.1 10.41,53.34 8.13,53.34 5.08,50.29 5.08,37.08 8.13,34.04 25.91,34.04 27.94,32 28.96,32 29.97,30.99 IC3.OUT
  Bottom 1.143: SV3.2 SV3.1 9.65,53.59 | SV3.2 SV3.3 | SV3.6 SV3.7 | SV3.7 SV3.8 | SV3.2 SV3.3 | SV3.6 SV3.7 | SV3.7 SV3.8 | SV3.3 SV3.4 | SV3.4 SV3.5 | SV3.6 SV3.7 | SV3.7 SV3.8 | SV3.8 10.67,70.36 10.92,70.1 10.92,69.09 SV3.7 | SV3.5 SV3.6 | SV3.4 SV3.5 | IC3.OUT 33.02,29.46 33.53,28.96 | 34.54,23.88 36.58,21.84 39.62,21.84 41.66,19.81 41.66,16.76 51.56,16.76 R9.1 53.85,13.97 53.85,8.64 51.82,6.6 C13.1

## Text on the board
Bottom: Robot Arm v1.00 | Ayush Akanksha Souri Saurav